# EAGLE board coprocessor_old (EAGLE 7.7.0)
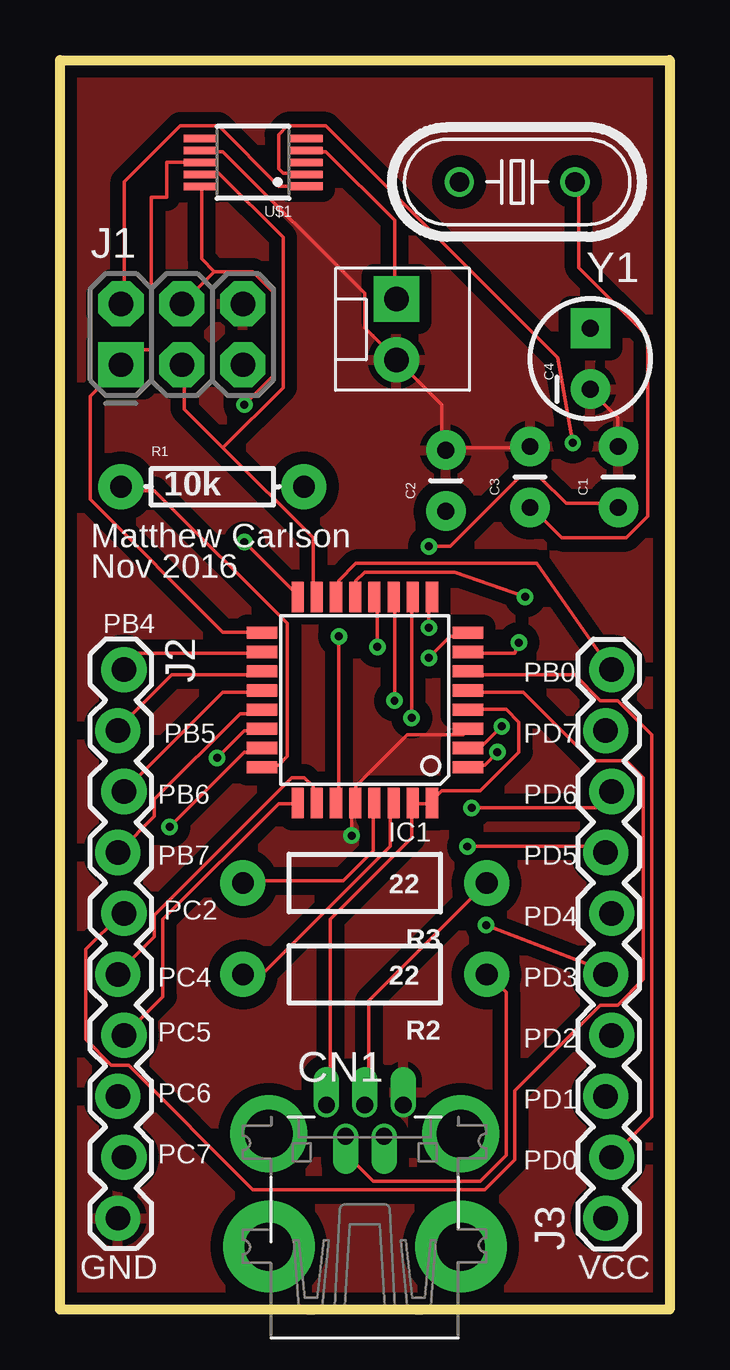
[diagram p0: board, top side]
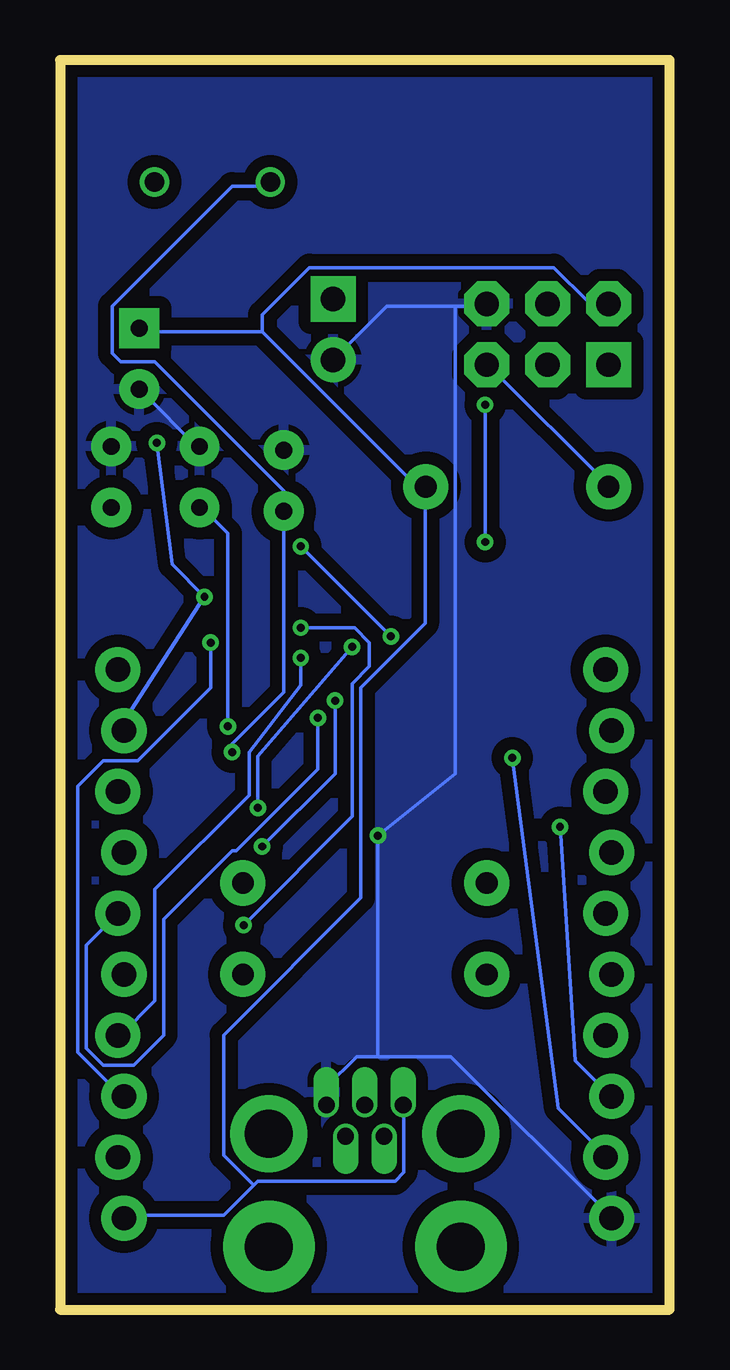
[diagram p1: board, bottom side, seen from below]

Size 25.4 x 52.07 mm. Coordinates in mm from the lower left corner, seen from the top.
Outline: 0,0 0,52.07 25.4,52.07 25.4,0 0,0
Copper layers (1*16): Top 0.0356mm / dielectric 1.5011mm / Bottom 0.0356mm
Design rules "oshpark-2layer": minimum track width 6mil, minimum drill 13mil, track to track 6mil, track to pad 6mil, pad to pad 6mil, via to via 6mil, smd to smd 6mil, copper to edge 15mil, drill to drill 6mil, minimum pad ring 7mil, minimum via ring 7mil, stop-mask expansion 2.5mil, vias tented up to drill 0mil, thermal gap 10mil
Net classes: 0 default: clearance 0.205 mm

## Footprints (pad centres in the part's own frame; a part is rotated, then mirrored left to right if it is on the bottom)
CAP-PTH-SMALL = drill 0.7 pad 1.651: 1 0,0; 2 2.54,0
CPOL-RADIAL-10UF-25V = drill 0.7 pad 1.651 square: 1 1.27,0 | drill 0.7 pad 1.651: 2 -1.27,0
USB-MINIB-THM = drill 0.7 offset: D+ 0,9.8; D- -0.8,8.5; GND 1.6,9.8; ID 0.8,8.5; VBUS -1.6,9.8 | drill 2 pad 3.81: GND1 -4,3.9; GND4 4,3.9 | drill 2 pad 3.2: GND2 -4,8.6; GND3 4,8.6
TQFP32-08 = smd 1.27 x 0.508: 1 -4.293,2.8; 2 -4.293,2; 3 -4.293,1.2; 4 -4.293,0.4; 5 -4.293,-0.4; 6 -4.293,-1.2; 7 -4.293,-2; 8 -4.293,-2.8; 17 4.293,-2.8; 18 4.293,-2; 19 4.293,-1.2; 20 4.293,-0.4; 21 4.293,0.4; 22 4.293,1.2; 23 4.293,2; 24 4.293,2.8 | smd 0.508 x 1.27: 9 -2.8,-4.293; 10 -2,-4.293; 11 -1.2,-4.293; 12 -0.4,-4.293; 13 0.4,-4.293; 14 1.2,-4.293; 15 2,-4.293; 16 2.8,-4.293; 25 2.8,4.293; 26 2,4.293; 27 1.2,4.293; 28 0.4,4.293; 29 -0.4,4.293; 30 -1.2,4.293; 31 -2,4.293; 32 -2.8,4.293
2X3-NS = drill 1.016 pad 1.88 square: 1 -2.54,-1.27 | drill 1.016 pad 1.88 octagon: 2 -2.54,1.27; 3 0,-1.27; 4 0,1.27; 5 2.54,-1.27; 6 2.54,1.27
1X10_LOCK = drill 1.016 pad 1.88: 1 0,0.127; 2 2.54,-0.127; 3 5.08,0.127; 4 7.62,-0.127; 5 10.16,0.127; 6 12.7,-0.127; 7 15.24,0.127; 8 17.78,-0.127; 9 20.32,0.127; 10 22.86,-0.127
MOLEX-1X2 = drill 1.016 pad 1.88 square: 1 0,0 | drill 1.016 pad 1.88: 2 2.54,0
AXIAL-0.3EZ = drill 0.9 pad 1.88: P$1 -3.81,0; P$2 3.81,0
AXIAL-0.4 = drill 0.9 pad 1.88: P$1 -5.08,0; P$2 5.08,0
10-MSOP = smd 1.4 x 0.3: 1 -2.2,1; 2 -2.2,0.5; 3 -2.2,0; 4 -2.2,-0.5; 5 -2.2,-1; 6 2.2,-1; 7 2.2,-0.5; 8 2.2,0; 9 2.2,0.5; 10 2.2,1
HC49U-V = drill 0.813: 1 -2.413,0; 2 2.413,0

## Placement (x,y rotation side)
C1  1uF  [CAP-PTH-SMALL]  23.27,33.43 90 top
C2  22pF  [CAP-PTH-SMALL]  16.08,33.27 90 top
C3  22pF  [CAP-PTH-SMALL]  19.58,33.43 90 top
C4  10uF  [CPOL-RADIAL-10UF-25V]  22.1,39.62 90 top
CN1  [USB-MINIB-THM]  12.7,-1.27 0 top
IC1  MEGA32U2  [TQFP32-08]  12.7,25.4 180 top
J1  [2X3-NS]  5.08,40.64 0 top
J2  [1X10_LOCK]  2.54,26.67 270 top
J3  [1X10_LOCK]  22.86,3.81 90 top
J4  [MOLEX-1X2]  14.02,42.11 270 top
R1  10k  [AXIAL-0.3EZ]  6.35,34.29 0 top
R2  22  [AXIAL-0.4]  12.7,13.97 180 top
R3  22  [AXIAL-0.4]  12.7,17.78 180 top
U$1  MCP48FEB01-E/UN  [10-MSOP]  8.05,47.8 180 top
Y1  16MHZ  [HC49U-V]  19.05,46.99 180 top

## Library data of the parts
C1-C4 = SparkFun-Capacitors
CN1 IC1 = adafruit
J1-J4 = SparkFun-Connectors
R1 = SparkFun-Resistors; PROD_ID: RES-12183
R2 R3 = SparkFun-Resistors
U$1 = custom
Y1 = SparkFun-FreqCtrl

## Nets
DAC_VOUT: J4.1 U$1.4
GND: C1.2 C2.2 C3.2 C4.2 CN1.GND IC1.3 IC1.28 J1.6 J2.10 J4.2 U$1.7
MISO: IC1.17 J1.1 U$1.8
MOSI: IC1.16 J1.4 U$1.10
N$4: IC1.29 R3.P$2
N$5: IC1.30 R2.P$2
N$6: CN1.D+ R3.P$1
N$7: C1.1 IC1.27
N$8: CN1.D- R2.P$1
N$9: C2.1 IC1.1 Y1.2
N$10: C3.1 IC1.2 Y1.1
PB0: IC1.14 J3.10
PB4: IC1.18 J2.1
PB5: IC1.19 J2.2
PB6: IC1.20 J2.3
PB7: IC1.21 J2.4
PC2: IC1.5 J2.5
PC4: IC1.26 J2.6
PC5: IC1.25 J2.7
PC6: IC1.23 J2.8
PC7: IC1.22 J2.9
PD0: IC1.6 J3.2
PD1: IC1.7 J3.3
PD2: IC1.8 J3.4
PD3: IC1.9 J3.5
PD4: IC1.10 J3.6
PD5: IC1.11 J3.7
PD6: IC1.12 J3.8
PD7: IC1.13 J3.9 U$1.2
RESET: IC1.24 J1.5 R1.P$1
SCK: IC1.15 J1.3 U$1.9
VCC: C4.1 CN1.VBUS IC1.4 IC1.31 IC1.32 J1.2 J3.1 R1.P$2 U$1.1

## Tracks (layer width: path | path; a pad name or v marks a point on that pad's centre or on a via)
DAC_VOUT
  Top 0.152: U$1.4 10.37,48.25 11.08,48.25 13.94,45.39 13.94,42.17 J4.1
GND  (via drill 0.33)
  Top 0.152: C1.2 23.23,36.1 23.23,37.17 22.16,38.24 C4.2 | C3.2 19.48,35.92 16.08,35.92 C2.2 15.9,35.92 15.9,37.71 14.12,39.49 J4.2 13.94,39.67 12.69,40.92 12.69,42.35 6.79,48.25 5.9,48.25 U$1.7 | IC1.3 16.98,24.12 16.8,23.95 14.47,23.95 12.33,21.8 12.33,21.27 IC1.28 12.15,21.09 v12.15,19.76
  Bottom 0.152: C4.2 21.98,38.24 19.66,35.92 C3.2 | 8.94,41.82 11.79,41.82 13.94,39.67 J4.2 | 8.94,41.82 7.68,41.82 J1.6 | 12.15,10.54 9.11,10.54 2.5,3.93 J2.10 | 12.15,10.54 13.04,10.54 14.3,9.29 14.3,8.58 CN1.GND | 12.15,10.54 v12.15,19.76 8.94,22.34 8.94,41.82
  pour Top (isolate 0.508): 0,52.07 25.4,52.07 25.4,0 0,0
  pour Bottom (isolate 0.508): 0,52.07 25.4,52.07 25.4,0 0,0
MISO
  Top 0.152: IC1.17 8.4,28.23 6.79,28.23 1.25,33.77 1.25,38.06 2.5,39.31 J1.1 2.54,40.01 3.81,40.01 3.81,46.35 4.45,46.35 4.45,47.8 U$1.8
MOSI  (via drill 0.33)
  Top 0.152: v7.68,31.99 9.83,29.84 IC1.16 | v7.68,37.71 8.94,38.96 8.94,42.35 8.04,43.24 6.43,43.24 | 6.43,43.24 5.18,41.99 J1.4 | 6.43,43.24 5.9,43.78 5.9,46.82 U$1.10
  Bottom 0.152: v7.68,37.71 v7.68,31.99
N$4
  Top 0.152: IC1.29 13.04,21.09 13.04,19.12 11.79,17.87 7.68,17.87 R3.P$2
N$5
  Top 0.152: IC1.30 13.76,21.09 13.76,19.3 8.58,14.12 7.68,14.12 R2.P$2
N$6
  Top 0.152: R3.P$1 12.87,12.87 12.87,8.58 CN1.D+
N$7  (via drill 0.33)
  Top 0.152: v11.62,28.06 11.62,21.27 IC1.27 | v15.37,31.81 16.26,31.81 19.12,34.67 20.01,34.67 21.09,33.6 23.23,33.6 C1.1
  Bottom 0.152: v15.37,31.81 v11.62,28.06
N$8
  Top 0.152: CN1.D- 11.97,7.15 11.97,6.43 13.04,5.36 17.51,5.36 18.59,6.43 18.59,13.22 17.87,13.94 R2.P$1
N$9  (via drill 0.33)
  Top 0.152: v18.23,23.23 17.69,22.7 17.16,22.7 IC1.1
  Bottom 0.152: v18.23,23.23 18.23,23.59 16.08,25.73 16.08,33.24 C2.1 16.08,33.42 16.08,34.13 21.44,39.49 22.87,39.49 23.23,39.85 23.23,41.82 18.23,46.82 16.8,46.82 Y1.2
N$10  (via drill 0.33)
  Top 0.152: v18.41,24.3 17.51,23.41 17.16,23.41 IC1.2 | Y1.1 21.62,46.82 21.62,43.42 24.48,40.56 24.48,33.06 23.59,32.17 20.91,32.17 19.66,33.42 C3.1
  Bottom 0.152: v18.41,24.3 18.41,32.34 19.48,33.42 C3.1
PB0
  Top 0.152: IC1.14 11.62,29.84 11.62,30.38 12.33,31.09 19.86,31.09 22.87,26.8 J3.10
PB4
  Top 0.152: IC1.18 8.4,27.34 3.22,27.34 2.68,26.8 J2.1
PB5
  Top 0.152: IC1.19 8.4,26.45 4.65,26.45 2.5,24.3 J2.2
PB6
  Top 0.152: IC1.20 8.4,25.73 6.79,25.73 2.68,21.62 J2.3
PB7
  Top 0.152: IC1.21 8.4,24.84 7.5,24.84 3.93,21.27 3.93,20.55 2.5,19.12 J2.4
PC2
  Top 0.152: IC1.5 17.16,25.73 19.3,25.73 22.16,22.87 23.59,22.87 24.3,22.16 24.3,13.76 23.23,12.69 22.52,12.69 18.94,9.11 18.94,6.25 17.69,5 8.04,5 2.86,10.19 2.14,10.19 1.07,11.26 1.07,15.01 2.5,16.44 J2.5
PC4
  Top 0.152: IC1.26 10.54,21.27 10.54,21.8 10.19,22.16 9.65,22.16 3.93,16.44 3.93,15.55 2.5,14.12 J2.6
PC5
  Top 0.152: IC1.25 9.83,21.09 9.11,21.09 4.29,16.26 4.29,13.04 J2.7
PC6  (via drill 0.33)
  Top 0.152: v4.57,20.11 7.68,23.23 8.4,23.23 IC1.23
  Bottom 0.152: v4.57,20.11 3.93,10.37 2.5,8.94 J2.8
PC7  (via drill 0.33)
  Top 0.152: v6.55,22.99 7.68,24.12 8.4,24.12 IC1.22
  Bottom 0.152: v6.55,22.99 4.65,8.4 2.68,6.43 J2.9
PD0
  Top 0.152: IC1.6 17.16,26.45 21.44,26.45 22.52,25.38 23.23,25.38 24.66,23.95 24.66,8.04 23.05,6.43 J3.2
PD1  (via drill 0.33)
  Top 0.152: v19.12,27.8 18.94,27.34 17.16,27.34 IC1.7
  Bottom 0.152: v19.12,27.8 19.12,25.91 22.16,22.87 23.59,22.87 24.66,21.8 24.66,10.72 22.87,8.94 J3.3
PD2  (via drill 0.33)
  Top 0.152: v15.37,27.16 16.26,28.06 16.98,28.06 IC1.8
  Bottom 0.152: v15.37,27.16 15.37,26.01 17.51,23.23 17.51,21.44 21.44,17.51 21.44,12.87 22.87,11.44 J3.4
PD3  (via drill 0.33)
  Top 0.152: v15.37,28.41 15.37,29.66 IC1.9 | v17.75,16.02 22.7,14.12 J3.5
  Bottom 0.152: v15.37,28.41 13.12,28.41 12.51,27.8 12.51,26.8 13.22,26.09 13.22,20.55 v17.75,16.02
PD4  (via drill 0.33)
  Top 0.152: v14.65,24.66 14.65,29.66 IC1.10
  Bottom 0.152: v14.65,24.66 14.65,22.52 18.05,19.12 18.23,19.12 21.09,16.26 21.09,11.44 22.34,10.19 23.59,10.19 24.3,10.9 24.3,15.19 23.05,16.44 J3.6
PD5  (via drill 0.33)
  Top 0.152: v13.94,25.38 13.94,29.66 IC1.11 | v16.98,19.3 22.52,19.3 22.7,19.12 J3.7
  Bottom 0.152: v13.94,25.38 13.94,22.34 v16.98,19.3
PD6  (via drill 0.33)
  Top 0.152: v13.22,27.62 13.22,29.66 IC1.12 | v17.16,20.91 22.34,20.91 22.87,21.44 J3.8
  Bottom 0.152: v13.22,27.62 17.16,23.05 v17.16,20.91
PD7  (via drill 0.33)
  Top 0.152: v19.38,29.7 16.44,30.74 12.69,30.74 12.33,30.38 12.33,29.84 IC1.13 | v21.36,36.12 20.73,39.67 11.08,49.32 9.47,49.32 9.11,48.96 9.11,47.53 9.29,47.35 10.19,47.35 U$1.2
  Bottom 0.152: J3.9 22.87,24.3 v19.38,29.7 20.73,31.05 v21.36,36.12
RESET
  Top 0.152: IC1.24 8.58,22.7 9.11,22.7 9.47,23.05 9.47,28.59 3.93,34.13 2.68,34.13 R1.P$1
  Bottom 0.152: J1.5 7.5,39.31 2.5,34.31 R1.P$1
SCK
  Top 0.152: 6.79,35.92 5.18,37.53 5.18,39.31 J1.3 | 6.79,35.92 10.54,32.17 10.54,29.84 IC1.15 | 6.79,35.92 9.29,38.42 9.29,44.67 6.61,47.35 5.9,47.35 U$1.9
VCC
  Top 0.152: IC1.4 17.16,25.02 18.59,25.02 19.12,24.48 19.12,23.23 17.51,21.62 15.9,21.62 15.55,21.27 IC1.32 15.37,21.09 14.83,21.09 IC1.31 14.65,21.09 14.65,19.66 11.26,16.26 11.26,8.58 CN1.VBUS | U$1.1 10.19,46.82 9.11,46.82 6.61,49.32 5,49.32 2.68,47 2.68,41.99 J1.2
  Bottom 0.152: 17.33,5.18 17.16,5.36 11.44,5.36 11.08,5.72 11.08,8.4 CN1.VBUS | 17.33,5.18 18.59,3.93 22.7,3.93 J3.1 | 16.98,40.74 21.98,40.74 C4.1 | 16.98,40.74 10.54,34.31 10.19,34.31 R1.P$2 10.19,34.13 10.19,28.59 12.87,25.91 12.87,17.16 18.59,11.44 18.59,6.43 17.33,5.18 | 16.98,40.74 16.98,41.46 15.01,43.42 4.83,43.42 3.4,41.99 2.68,41.99 J1.2

## Text on the board
tPlace: Matthew Carlson | Nov 2016 | PB4 | PB0 | PB5 | PD7 | PB6 | PD6 | PB7 | PD5 | PC2 | PD4 | PC4 | PD3 | PC5 | PD2 | PC6 | PD1 | PC7 | PD0 | GND | VCC